# Altium PCB PCB1.PcbDoc
Units mil, origin at the board's own origin, x right, y up, seen from the top; angles counter-clockwise.
Board outline 2579.69 x 2049.7 mil, 2 copper layers (Top Layer, Bottom Layer); 45 components, 37 nets, 189 pads, 20 vias.
Unrouted connection lines stored in the file: 49.
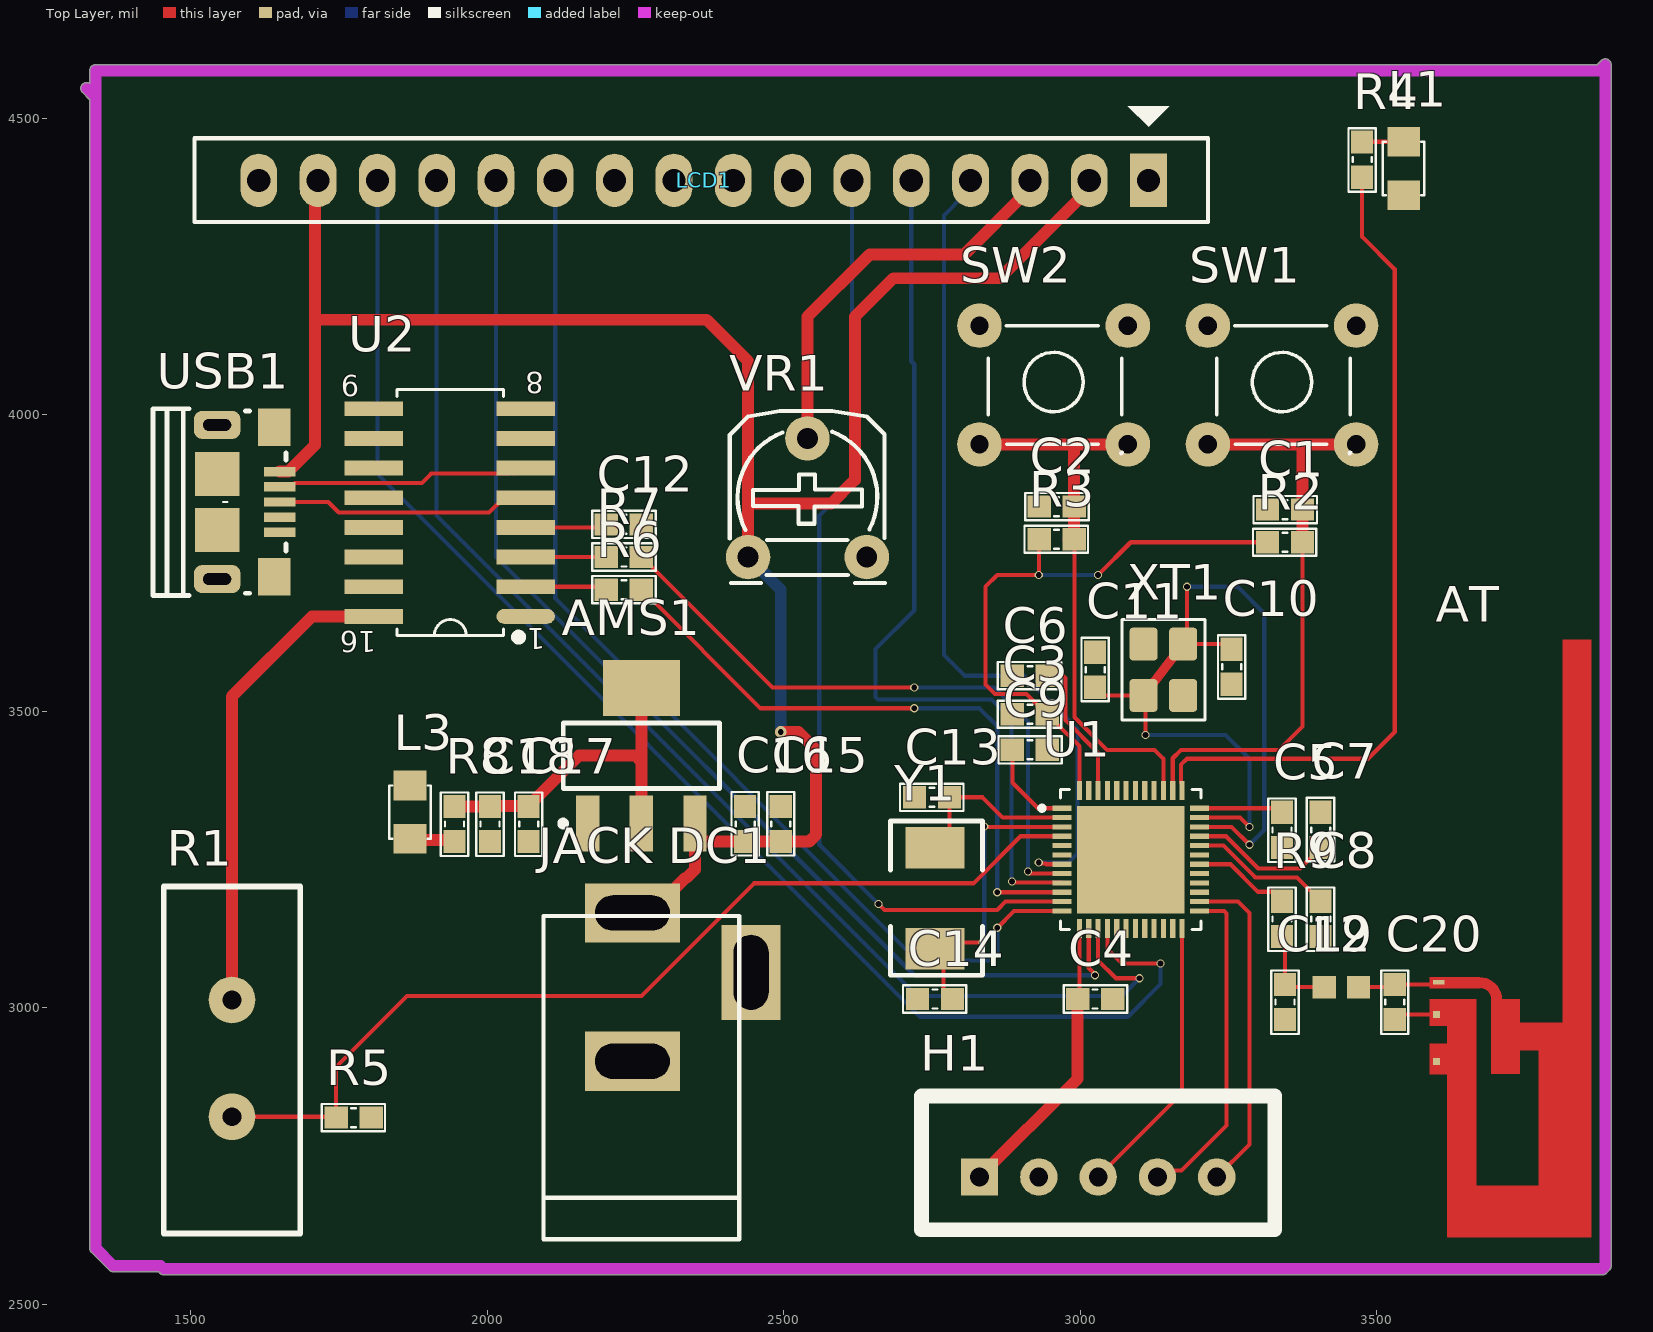
[diagram p0: Top Layer view]
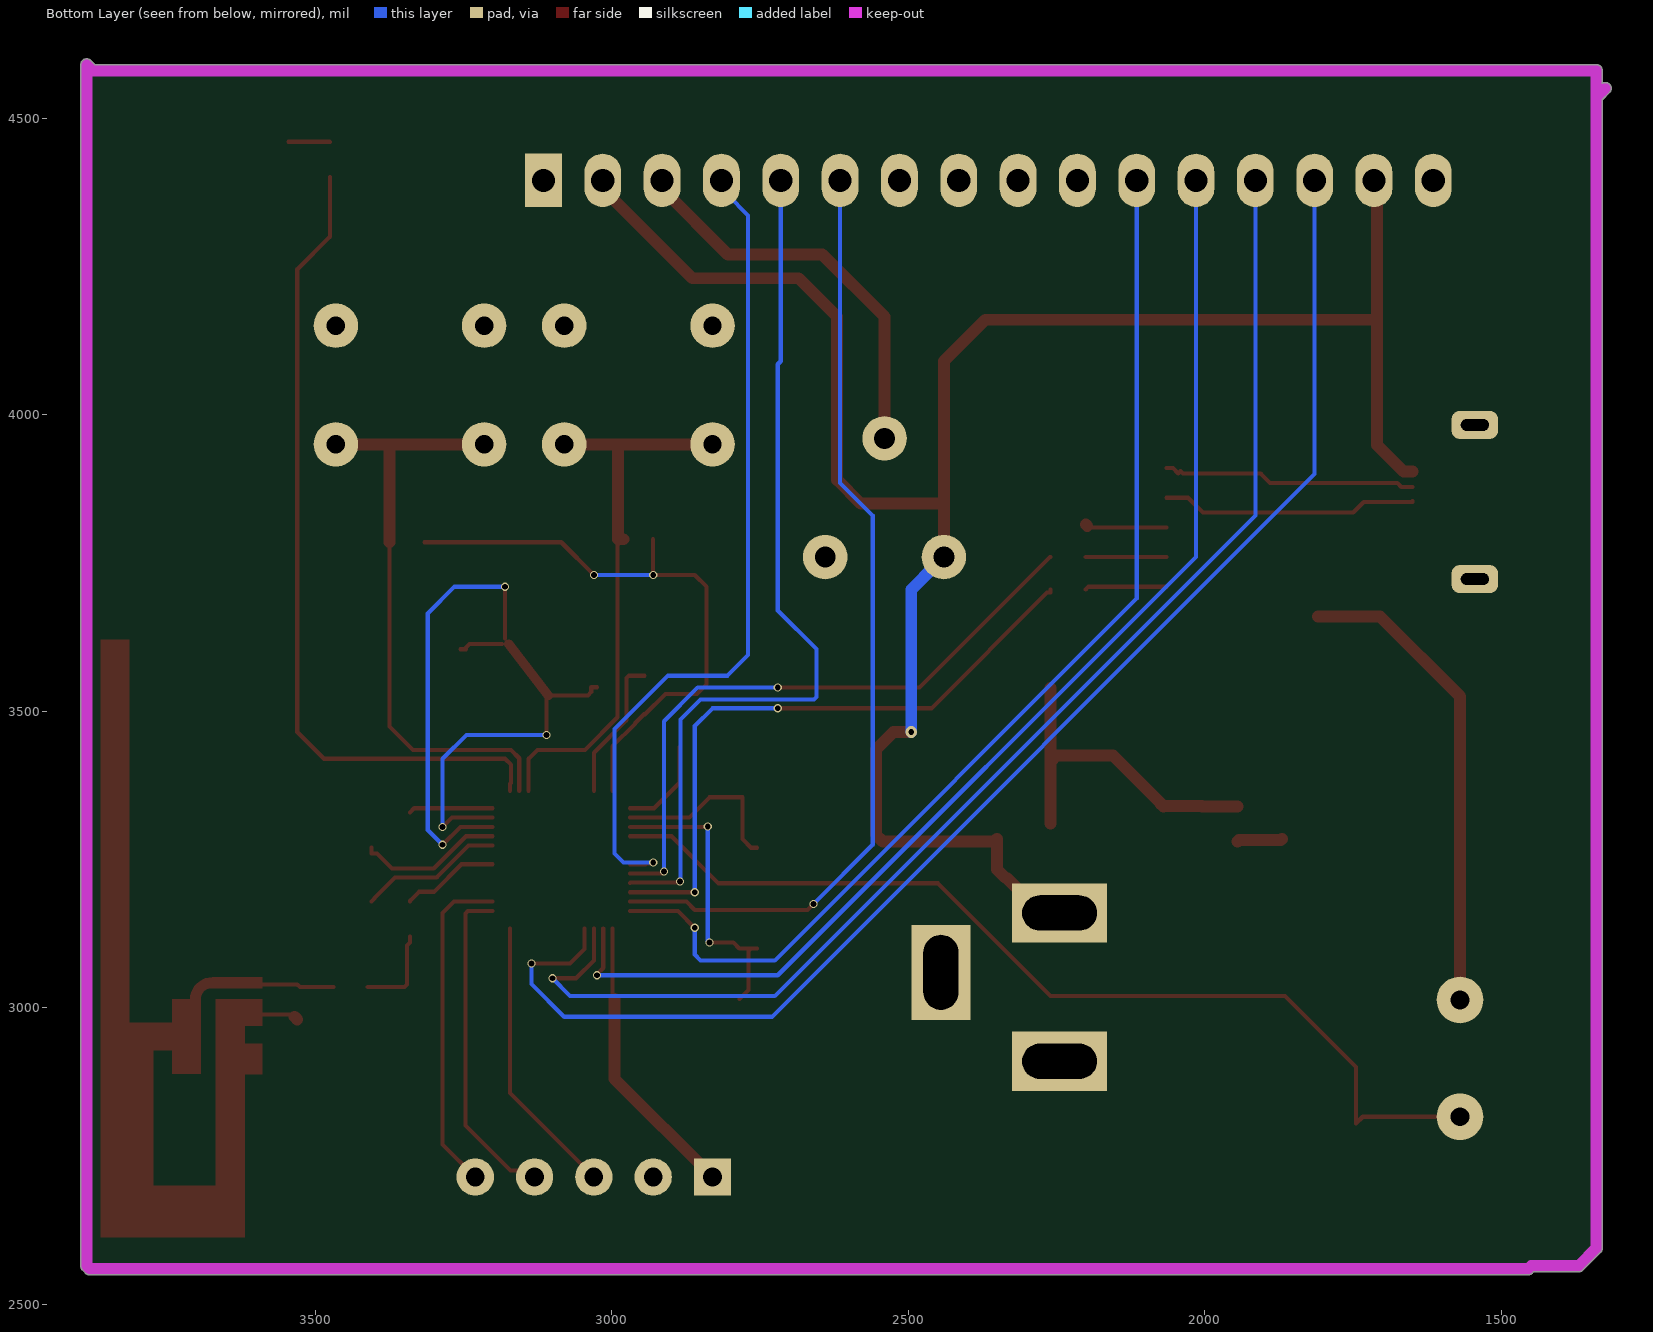
[diagram p1: Bottom Layer view, seen from below]
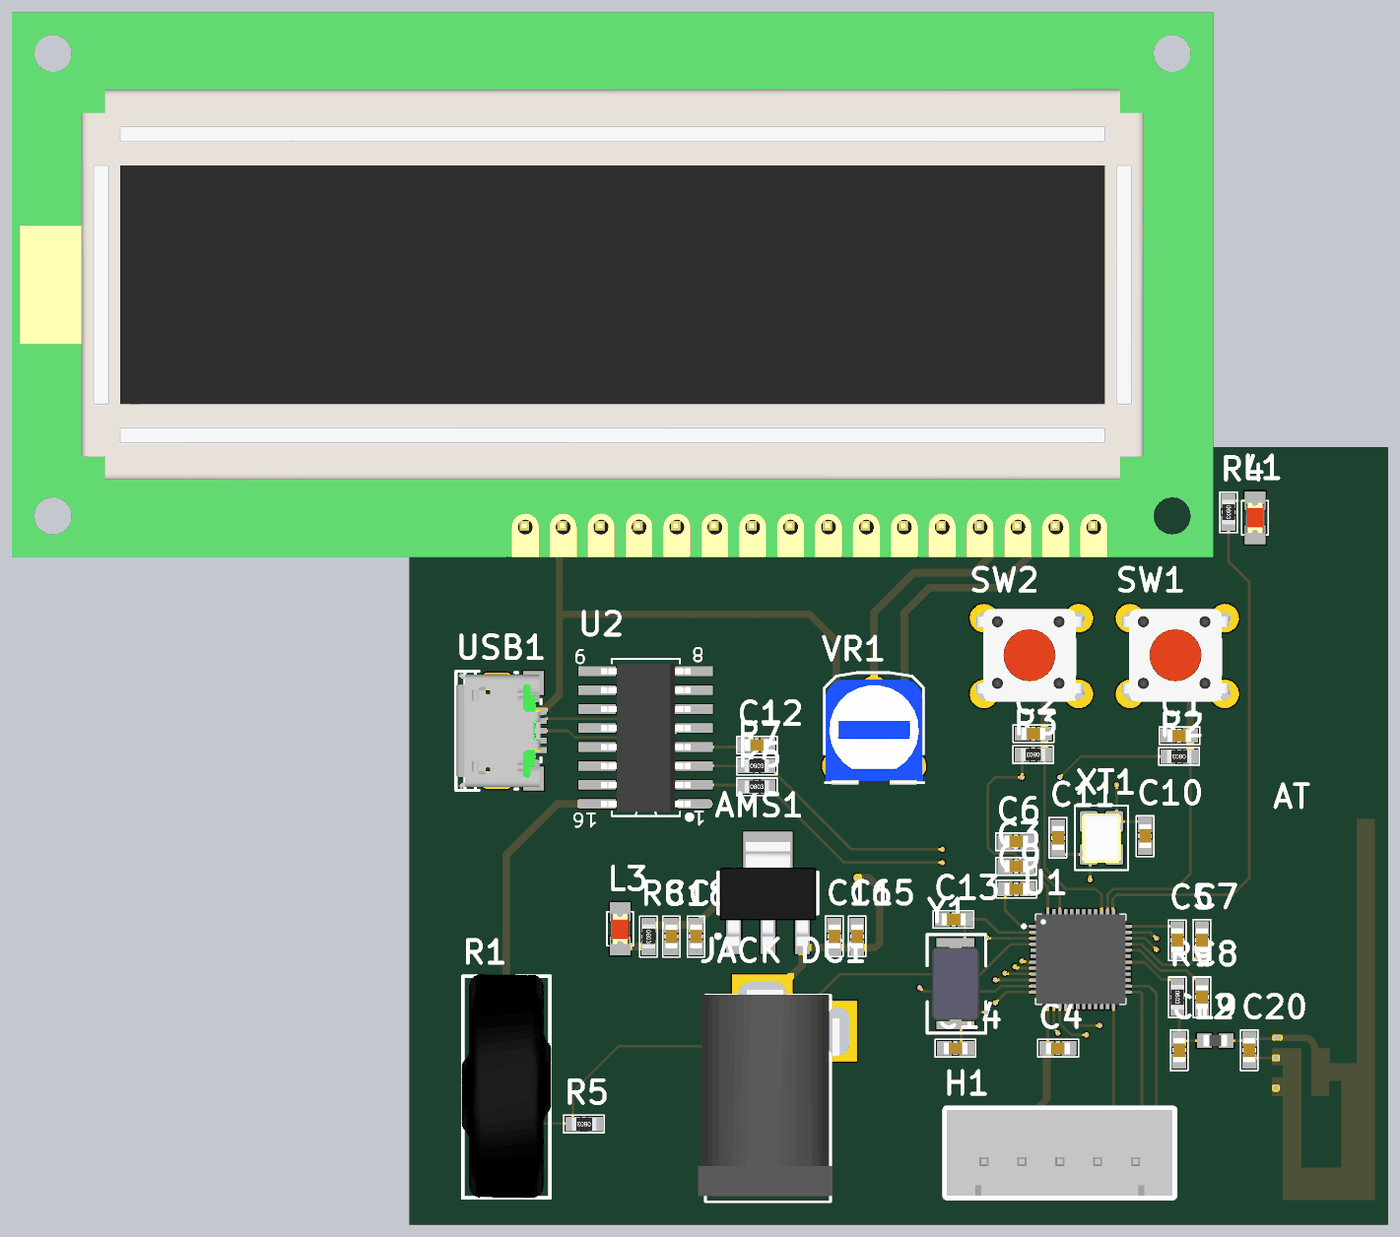
[diagram p2: 3D render of the assembled board from above, using the file's embedded part models]

## Layer stack, top to bottom
Top Solder: solder mask 0.4, Solder Resist, Dk 3.5
Top Layer: signal copper 1.4
Dielectric 1: dielectric 12.6, FR-4, Dk 4.8
Bottom Layer: signal copper 1.4
Bottom Solder: solder mask 0.4, Solder Resist, Dk 3.5

## Board outline
1333.02,2588.04 ccw(c1340.02,2595.02) 1333.04,2588.02 1333.03,2588.03 cw(c1340,2595) 1330.14,2595 1330.14,4530.92 1318.03,4543.03 cw(c1325,4550) 1330.14,4558.41 1330.14,4580 cw(c1340,4580) 1340,4589.86 3870.92,4589.86 3878.04,4596.98 ccw(c3885.02,4589.98) 3878.02,4596.96 3878.03,4596.97 cw(c3885,4590) 3894.86,4590 3894.86,2565 cw(c3885,2565) 3891.97,2558.03 3886.96,2553.02 ccw(c3879.98,2560.02) 3886.98,2553.04 3886.97,2553.03 cw(c3880,2560) 3880,2550.14 1455,2550.14 cw(c1455,2560) 1448.03,2553.03 1448.04,2553.02 cw(c1455.02,2560.02) 1448.02,2553.04 1445.92,2555.14 1370,2555.14 cw(c1370,2565) 1363.03,2558.03

## Design rules (kind name [scope] priority, off if disabled: settings)
Clearance [All] p1: gap=0 ignorepadtopadclearanceinfootprint=FALSE
PolygonConnect [All] p1: connectstyle=Relief reliefconductorwidth=10 reliefentries=4 polygonreliefangle="90 Angle" airgapwidth=10
RoutingVias [All] p1: holewidth=9.84 width=13.78 viastyle="Through Hole" minholewidth=9.84 minwidth=13.78 maxholewidth=9.84 maxwidth=13.78
SolderMaskExpansion [All] p1: expansion=4 istentingtop=FALSE
Width [All] p1: maxlimit=30 minlimit=7 preferedwidth=20
30 further rules are at their usual default settings.

## Components (designator, comment, footprint, x,y, rotation, side; value= is the part's Value field where it differs from the comment)
AMS1 "AMS1117-3.3V" SOT223 2260,3425 r0 top value="AMS1117-3.3V SOT223"
AT "ANTEN" "Anten IFA" 3524,2960 r270 top
C1 "104" "tu 0603" 3345,3840 r0 top
C2 "104" "tu 0603" 2960,3845 r0 top
C3 "104" "tu 0603" 2915,3495 r180 top
C4 "104" "tu 0603" 3025,3015 r0 top
C5 "104" "tu 0603" 3340,3300 r270 top
C6 "0.1uF" "tu 0603" 2915,3560 r180 top
C7 "100pF" "tu 0603" 3405,3300 r90 top
C8 "100pF" "tu 0603" 3405,3150 r270 top
C9 "0.1uF" "tu 0603" 2915,3435 r0 top
C10 "12pF" "tu 0603" 3255,3575 r270 top
C11 "12pF" "tu 0603" 3025,3570 r90 top
C12 "104" "tu 0603" 2230.47,3815 r0 top
C13 "10pF" "tu 0603" 2750,3355 r180 top
C14 "10pF" "tu 0603" 2755,3015 r180 top
C15 "106" "tu 0603" 2495,3310 r90 top
C16 "104" "tu 0603" 2435,3310 r90 top
C17 "106" "tu 0603" 2070,3310 r270 top
C18 "104" "tu 0603" 2005,3310 r270 top
C19 "10pF" "tu 0603" 3345,3010 r270 top
C20 "10pF" "tu 0603" 3530,3010 r270 top
H1 "Header 5P 2.54 Duc Thang" XH2.54M-5 2830,2715 r0 top
"JACK DC1" "JACK DC 5.5" "JACK DC 5.5" 2345,3035 r90 top value="Jac DC"
L1 "LED 0805" LED-0805-Red 3545,4460 r270 top
L2 "LQM18DN6R8M70L" INDC1608X95N 3440,3035 r0 top
L3 "LED 0805" LED-0805-Red 1870,3285 r90 top
LCD1 "LCD1602 XL" "LCD1602 with Jump" 3115,4395 r180 top
R1 "10D-9" "tro nhiet d-9" 1570,2915 r90 top
R2 "1k" "tro smd 0603" 3345,3785 r180 top
R3 "1k" "tro smd 0603" 2960,3790 r180 top
R4 "1k" "tro smd 0603" 3475,4430 r270 top
R5 "10k" "tro smd 0603" 1775,2815 r180 top
R6 "1k" "tro smd 0603" 2230.47,3705 r0 top
R7 "1k" "tro smd 0603" 2230.47,3760 r0 top
R8 "1k" "tro smd 0603" 1945,3310 r270 top
R9 "0" "tro smd 0603" 3340,3150 r270 top
SW1 "SW" SW4 3215,4150 r0 top value="Button chip 4 pin"
SW2 "SW" SW4 2830,4150 r0 top value="Button chip 4 pin"
U1 "NRF52832-QFAA-R" QFN40P600X600X90-49N 3085,3250 r0 top
U2 "CH340C" SOIC16_50_284_25X90_SMT 1937.05,3834.02 r180 top
USB1 "USB Micro 5p DIP" "USB Micro 5p DIP" 1545,3852.76 r270 top
VR1 "10K" "Bien Tro Tam Giac Dung" 2440,3760 r0 top
XT1 "20Mhz" "Thach Anh 4 chan 1" 3140,3570 r90 top value=4Mhz
Y1 "32.768K" "Thach Anh 2 chan SMD5032" 2755,3185 r270 top value=4Mhz

## Footprints (in the part's own frame and the unit in brackets; to place one, negate y for a bottom-side part, rotate by r counter-clockwise, add the part's x,y. Pads: shape width x height; smd on the part's side, far side on the other; paste and mask are expansions set on the pad)
"Anten IFA" [mm]
  rect 0.3x0.3 smd: 1(-0.737,1.93) 2(1.27,1.93)
  rect 0.2x0.5 smd: 3(-2.108,2.032)
  Top Layer region: -16.784,7.351 -16.784,8.561 8.796,8.561 8.796,2.391 1.816,2.391 1.816,1.651 0.521,1.651 0.521,2.391 -0.259,2.391 -0.259,1.651 -1.383,1.651 -1.383,3.643 6.596,3.643 6.596,6.313 0.796,6.313 0.796,5.498 1.811,5.498 1.811,4.294 -1.389,4.294 -1.571,4.258 -1.725,4.154 -1.828,4 -1.865,3.818 -1.865,3.818 -1.865,1.651 -2.325,1.651 -2.325,3.797 -2.253,4.157 -2.049,4.463 -1.743,4.667 -1.383,4.738 -1.383,4.739 -1.383,5.513 -0.388,5.513 -0.388,7.351
"Bien Tro Tam Giac Dung" [mil] "RM065"
  round 75 hole 35: 1(0,0) 2(100,200) 3(200,0)
  silkscreen extent -31,-44 231,246, body extent -28,-50 228,228, height 279
INDC1608X95N [mm]
  rect 1x0.97 smd: 1(-0.735,0) 2(0.735,0)
  body extent -0.8,-0.4 0.8,0.4, height 0.95
"JACK DC 5.5" [mil] "Jac DC input"
  rect 100x160 hole 59.06 slot 125.98 at 90 deg: 1(125,100) 2(-125,100)
  rect 160x100 hole 59.06 slot 125.98 at 0 deg: 3(25,-100)
  silkscreen extent -425,-80 120,250, body extent -410,-105 134,269, height 434
"LCD1602 with Jump" [mil] "LCD dipslay 16x2, 16 pin"
  rect 62x90 hole 39: 1(0,0)
  oval 62x90 hole 39: 2(100,0) 3(200,0) 4(300,0) 5(400,0) 6(500,0) 7(600,0) 8(700,0) 9(800,0) 10(900,0) 11(1000,0) 12(1100,0) 13(1200,0) 14(1300,0) 15(1400,0) 16(1500,0)
  silkscreen extent -100,-125 1608,70, body extent -320,-1353 2850,84, height 764
LED-0805-Red [mil]
  rect 50x55 smd: 1(0,0) 2(90,0)
  silkscreen extent 0,-35 90,35, body extent 5,-25 85,25, height 43
QFN40P600X600X90-49N [mm]
  rect 0.81x0.22 smd: 1(-2.95,2.2) 2(-2.95,1.8) 3(-2.95,1.4) 4(-2.95,1) 5(-2.95,0.6) 6(-2.95,0.2) 7(-2.95,-0.2) 8(-2.95,-0.6) 9(-2.95,-1) 10(-2.95,-1.4) 11(-2.95,-1.8) 12(-2.95,-2.2) 25(2.95,-2.2) 26(2.95,-1.8) 27(2.95,-1.4) 28(2.95,-1) 29(2.95,-0.6) 30(2.95,-0.2) 31(2.95,0.2) 32(2.95,0.6) 33(2.95,1) 34(2.95,1.4) 35(2.95,1.8) 36(2.95,2.2)
  rect 0.22x0.81 smd: 13(-2.2,-2.95) 14(-1.8,-2.95) 15(-1.4,-2.95) 16(-1,-2.95) 17(-0.6,-2.95) 18(-0.2,-2.95) 19(0.2,-2.95) 20(0.6,-2.95) 21(1,-2.95) 22(1.4,-2.95) 23(1.8,-2.95) 24(2.2,-2.95) 37(2.2,2.95) 38(1.8,2.95) 39(1.4,2.95) 40(1,2.95) 41(0.6,2.95) 42(0.2,2.95) 43(-0.2,2.95) 44(-0.6,2.95) 45(-1,2.95) 46(-1.4,2.95) 47(-1.8,2.95) 48(-2.2,2.95)
  rect 4.6x4.6 smd paste-3: 49(0,0)
  silkscreen extent -3.9,-3 3,3, body extent -3,-3 3,3, height 0.9
SOIC16_50_284_25X90_SMT [mm]
  oval 2.5x0.635 smd mask+0.076: 1(-3.25,4.42)
  rect 2.5x0.635 smd mask+0.076: 2(-3.25,3.15) 3(-3.25,1.88) 4(-3.25,0.61) 5(-3.25,-0.66) 6(-3.25,-1.93) 7(-3.25,-3.2) 8(-3.25,-4.47) 9(3.25,-4.47) 10(3.25,-3.2) 11(3.25,-1.93) 12(3.25,-0.66) 13(3.25,0.61) 14(3.25,1.88) 15(3.25,3.15) 16(3.25,4.42)
  silkscreen extent -3.07,-5.3 2.26,5.44, body extent -3.02,-4.97 2.98,4.93, height 1.4
SOT223 [mm]
  rect 1x2.4 smd: 1(-2.3,-2.9) 2(0,-2.9) 3(2.3,-2.9)
  rect 3.3x2.4 smd: 4(0,2.9)
  silkscreen extent -3.47,-3.02 3.35,1.4, body extent -3.25,-3.56 3.25,3.4, height 1.68
SW4 [mil] "SW button 4pin, 250 x250 mil"
  round 75 hole 31: 1(0,0) 2(250,-200) 3(250,0) 4(0,-200)
  silkscreen extent 15,-215 240,0, body extent -36,-220 276,24, height 276
"Thach Anh 2 chan SMD5032" [mil] "DO-214-AA/SMB; 2 C-Bend Leads; Body 5.3 x 3.6 mm, inc. leads (LxW)"
  rect 70x100 smd: 1(-85,0) 2(85,0)
  silkscreen extent -130,-75 130,80, body extent -98,-63 98,63, height 51
"Thach Anh 4 chan 1" [mm] "SMD Crystal 4-lead leadless package"
  round 0.508 on Mech15: 0(0,0)
  rrect25% 1.4x1.2 smd: 1(-1.1,-0.85) 2(1.1,-0.85) 3(1.1,0.85) 4(-1.1,0.85)
  Top Layer lines w0.4: -1.1,0.85 1.1,-0.85
  silkscreen extent -2.16,-1.78 2.16,1.78, body extent -1.65,-1.3 1.65,1.3, height 0.8
"tro nhiet d-9" [mm]
  round 2 hole 0.8: 1(-2.5,0) 2(2.5,0)
  silkscreen extent -7.49,-2.92 7.37,2.92, body extent -7.5,-3 7.5,3, height 23.5
"tro smd 0603" [mm] "Chip Capacitor, 2-Leads, Body 1,60x0,80mm, IPC Medium Density"
  rect 1x0.95 smd mask+0.076: 1(-0.75,0) 2(0.75,0)
  silkscreen extent -1.35,-0.58 1.37,0.58, body extent -0.82,-0.42 0.82,0.43, height 0.44
"tu 0603" [mm] "Chip Capacitor, 2-Leads, Body 1,60x0,80mm, IPC Medium Density"
  rect 1x0.95 smd mask+0.076: 1(-0.75,0) 2(0.75,0)
  silkscreen extent -1.35,-0.58 1.37,0.58, body extent -0.8,-0.4 0.8,0.4, height 0.9
"USB Micro 5p DIP" [mm]
  rect 0.4x1.35 smd mask+0.05: 1(-1.3,2.675) 2(-0.65,2.675) 3(0,2.675) 4(0.65,2.675) 5(1.3,2.675)
  rrect60% 1.2x2 hole 0.5 slot 1.2 at 90 deg: 5(-3.3,0) 5(3.3,0)
  rect 1.6x1.4 smd: 5(-3.2,2.45) 5(3.2,2.45)
  rect 1.9x1.9 smd paste-10: 5(-1.2,0) 5(1.2,0)
  silkscreen extent -4,-2.75 4,2.95, body extent -3.93,-2.76 3.93,2.9, height 2.85
XH2.54M-5 [mm]
  rect 1.6x1.6 hole 0.8: 1(0,0)
  round 1.6 hole 0.8: 2(2.54,0) 3(5.08,0) 4(7.62,0) 5(10.16,0)
  silkscreen extent -2.48,-2.26 12.64,3.46, body extent -2.48,-2.26 12.64,3.48, height 6.91

## Part data
AMS1: library part "AMS1117 SMD", "Dán", Chung_Loai=Dán, Don_Vi=Con, Ma_Hang=MH000596
AT: "Anten IFA- BLE RANGDONG"
C1 C2 C3 C4 C5 C6 C7 C8 C9 C10 C11 C13 C14 C19 C20: library part "Tu 0603 102 50V 10%", "Dán", Chung_Loai=Dán, Don_Vi=Con, Ma_Hang=MH004566, So_Chan=2, Ten_Linh_Kien="Tụ 0603 102-1nF 10% 50V"
C12 C16 C18: library part "Tu 0603 104 50V 10%", "Dán", Chung_Loai=Dán, Don_Vi=Con, Ma_Hang=MH004568, So_Chan=2, Ten_Linh_Kien="Tụ 0603 104-100nF 10% 50V"
C15 C17: library part "Tu 0603 106 16V 20%", "Dán", Chung_Loai=Dán, Don_Vi=Con, Ma_Hang=MH004848, So_Chan=2, Ten_Linh_Kien="Tụ 0603-10uF 20% 16V"
H1: "Cắm", Chung_Loai=Cắm, Don_Vi=Con, Ma_Hang=MH001298, Ten_Linh_Kien="Header 5P XH2.54-5P Đực Thẳng"
L1 L3: library part "LED 0805 Do", "Dán", Chung_Loai=Dán, Don_Vi=Con, Ma_Hang=MH000897, Ten_Linh_Kien="LED 0805 Màu Đỏ (Red)"
L2: "Inductor with Inductance 6.8uH Tol.+/-20% Package 0603 (1608)", Package="0603 Murata", Availability=Warning, Check_prices=https://www.snapeda.com/parts/LQM18DN6R8M70L/Murata/view-part/4901183/?ref=eda, MF="Murata Electronics", MP=LQM18DN6R8M70L, Price=None, Purchase-URL=https://pricing.snapeda.com/search/part/LQM18DN6R8M70L/?ref=eda, SnapEDA_Link=https://www.snapeda.com/parts/LQM18DN6R8M70L/Murata/view-part/4901183/?ref=snap
LCD1: "LCD 1602 Xanh Lá", CHIP=HD44780, Ma_Hang=67HZ, NCC=NSHOP, Ten="Màn hình LCD 1602 Xanh Lá"
R1: library part "Tro Nhiet NTC 10D-9", "Cắm", Chung_Loai=Cắm, Don_Vi=Con, Ma_Hang=MH000922, So_Chan=2, Ten_Linh_Kien="Điện trở nhiệt NTC 10D-9"
R2 R3 R4 R5 R6 R7 R8 R9: library part "Tro 0603 1% 1k", "Dán", Chung_Loai=Dán, Don_Vi=Con, Ma_Hang=MH006334, So_Chan=2, Ten_Linh_Kien="Trở 0603 1% 1k"
SW1 SW2: library part SW4, "Switch button 4 pin"
U1: "IC RF TxRx + MCU Bluetooth, General ISM > 1GHz ANT, Bluetooth v5.0 2.4GHz 48-VFQFN Exposed Pad", Package="VFQFN-48 Nordic Semiconductor", Check_prices=https://www.snapeda.com/parts/NRF52832-QFAA-R/Nordic+Semiconductor+ASA/view-part/?ref=eda, MF=Nordic, MP=NRF52832-QFAA-R, SnapEDA_Link=https://www.snapeda.com/parts/NRF52832-QFAA-R/Nordic+Semiconductor+ASA/view-part/?ref=snap
U2: "USB Bridge, USB to UART USB 2.0 UART Interface", Alternate Part Number-1=NA, Case/Package=SOIC16, Manufacturer=Olimex, Supplier Part Number-1=C84681, Manufacturer Part Number=CH340C, Supplier-1=LCSC
USB1: "USB Type B", Ma_Hang=MH005145, Ten="MicroUSB MK5P DIP"
VR1: library part "Bien tro tam giac 10K Dung", "Cắm", Chung_Loai=Cắm, Don_Vi=Con, Ma_Hang=MH000919, Ten_Linh_Kien="Biến Trở Tam Giác 103-10K RM065 (Chân Đứng)"
XT1: library part "Thach Anh 4 Chan SMD", "Crystal For all Crystal 2pin."
Y1: library part "Thach Anh 2 chan SMD 5032", "Crystal For all Crystal 2pin."

## Via types
v1: diameter 13.78, hole 9.84, Top Layer to Bottom Layer, 19 vias
v2: diameter 19.68, hole 9.84, Top Layer to Bottom Layer, 1 vias

## Nets (pads, with @x,y where several pads share a name; then routed paths per layer and width w, separated by ;. In a path a pad name is that pad's centre, name@x,y a point inside that pad or via, vN(x,y) a via of type N, cw(c..) or ccw(c..) an arc to the next point about the centre after c; other vN are vias at no path point)
+3.3V: AMS1.2 AMS1.4 C3.1 C4.1 C5.1 C12.1 C17.1 C18.1 H1.1 R1.2 R2.2 R3.2 R8.1 U1.13 U1.36 U1.48 U2.4 U2.16 | length 3167.8
  Top Layer w7: U2.4 2195.94,3810 C12.1@2198.44,3812.5 ; v1(2930,3730) 2860,3730 2840,3710 2840,3545 2855.9,3529.1 2909.44,3529.1 2943.54,3495 C3.1 2945.51,3495 2960.71,3479.8 2960.71,3478.81 2998.39,3441.14 U1.48 ; v1@2930.47,3730 R3.2 ; C4.1 2998.39,3017.91 U1.13 ; v1(3030,3730) 3085,3785 R2.2 ; U1.36 3332.91,3336.61 C5.1
  Top Layer w20: R1.2 1570,3525 1705,3660 U2.16 ; R8.1 2004.02,3339.53 C18.1@2005,3340.51 ; C18.1 C18.1@2005,3340.51 ; C17.1@2069.02,3340.51 C18.1@2005,3340.51 ; C17.1 2075,3344.53 2075,3345.51 2155,3425.51 2249.49,3425.51 2260,3415 ; C12.1@2198.44,3812.5 C12.1 ; AMS1.2 2260,3415 ; AMS1.4 2260,3415 ; H1.1 2995.47,2880.47 C4.1
  Bottom Layer w7: v1(2930,3730) v1(3030,3730)
+5: "JACK DC1.1" AMS1.3 C15.1 C16.1 LCD1.2 LCD1.15 USB1.1 VR1.1 | length 3538
  Top Layer w7: LCD1.15@1710,4390 LCD1.15
  Top Layer w20: USB1.1 1664.76,3903.94 1710,3949.17 1710,4160 ; LCD1.15@1710,4390 1710,4160 ; 2285,3160 2285,3170 2334.44,3219.44 2336.41,3219.44 2350.55,3233.58 2350.55,3285 2355.08,3280.47 C16.1 C15.1 2542.81,3280.47 2554.53,3292.19 2554.53,3435.47 2525,3465 v2(2495,3465) ; VR1.1 2440,3850 ; LCD1.2 3020,4395 3020,4386 2864,4230 2685,4230 2620,4165 2620,3890 2580,3850 2440,3850 ; 1710,4160 2370,4160 2440,4090 2440,3850
  Top Layer w30: 2245,3160 2285,3160
  Bottom Layer w20: VR1.1 2445,3760 2445,3745 2455,3745 2495,3705 v2(2495,3465)
ANT: R9.1 U1.30 | length 165.4
  Top Layer w7: U1.30 3252.87,3242.13 3299.29,3195.71 3324.8,3195.71 3340,3180.51 R9.1
BUTTON1: C2.2 R3.1 SW2.2 SW2.4 U1.39 | length 958.4
  Top Layer w7: R3.1@2980,3790 2990,3780 2990,3490 3045,3435 3125,3435 3140.12,3419.88 U1.39
  Top Layer w20: SW2.4 2985,3950 ; R3.1@2980,3790 R3.1 C2.2 2989.53,3945.47 2985,3950 ; SW2.2 2985,3950
BUTTON2: C1.2 R2.1 SW1.2 SW1.4 U1.38 | length 1023
  Top Layer w7: U1.38 3155.87,3420.87 3170,3435 3335,3435 3374.53,3474.53 R2.1
  Top Layer w20: SW1.4 3370,3950 ; R2.1 C1.2 3374.53,3945.47 3370,3950 ; SW1.2 3370,3950
CLK: H1.4 U1.25 | length 557.3
  Top Layer w7: H1.4 3140.71,2725.71 3170.71,2725.71 3246.61,2801.61 3246.61,3159.29 3242.51,3163.39 U1.25
D4: LCD1.11 U1.12 | length 1872.4
  Top Layer w7: v1(2860,3135) 2888.39,3163.39 U1.12
  Bottom Layer w7: LCD1.11 2115,3690 2725,3080 2850,3080 2860,3090 v1(2860,3135)
D5: LCD1.12 U1.14 | length 2020.4
  Top Layer w7: U1.14 3014.13,3067.7 3025,3056.83 v1(3025,3055)
  Bottom Layer w7: LCD1.12 2015,3760 2720,3055 v1(3025,3055)
D6: LCD1.13 U1.15 | length 2234.3
  Top Layer w7: U1.15 3030,3133.74 3030,3080 3060,3050 v1(3100,3050)
  Bottom Layer w7: LCD1.13 1915,3830 2725,3020 3070,3020 v1(3100,3050)
D7: LCD1.14 U1.16 | length 2385.7
  Top Layer w7: U1.16 3045.63,3099.37 3070,3075 v1(3135,3075)
  Bottom Layer w7: LCD1.14 1815,3900 2730,2985 3080,2985 3135,3040 v1(3135,3075)
DIO: H1.5 U1.26 | length 559.6
  Top Layer w7: U1.26 3265.87,3179.13 3285,3160 3285,2770 H1.5
EN: LCD1.6 U1.11 | length 1607.2
  Top Layer w7: v1(2660,3175) 2670,3165 2860,3165 2874.13,3179.13 U1.11
  Bottom Layer w7: LCD1.6 2615,4385 2620,4380 2615,4375 2615,3885 2560,3830 2560,3275 v1(2660,3175)
GND: "JACK DC1.2" "JACK DC1.3" AMS1.1 AT.1 AT.2 C1.1 C2.1 C3.2 C4.2 C5.2 C7.2 C8.2 C9.2 C10.2 C11.2 C12.2 C13.2 C14.2 C15.2 C16.2 C17.2 C18.2 C19.2 C20.2 H1.2 L1.2 L3.2 LCD1.1 LCD1.16 R5.1 SW1.1 SW1.3 SW2.1 SW2.3 U1.31 U1.45 U2.1 USB1.5 VR1.3 XT1.1 XT1.3 | length 73.5
  Top Layer w7: C20.2@3534.53,2985 3538.53,2989 AT.1
  Top Layer w20: C20.2 C20.2@3534.53,2985
LED: R4.2 U1.37 | length 1385.6
  Top Layer w7: U1.37 3171.61,3377.76 3170,3379.37 3170,3410 3180,3420 3485,3420 3530,3465 3530,4245 3475,4300 R4.2
NetAT_3: AT.3 C20.1 L2.2 | length 138.4
  Top Layer w7: L2.2 3525.47,3035 C20.1 3600.53,3039.53 AT.3
NetC6_1: C6.1 U1.46 | length 244.7
  Top Layer w7: C6.1 2970.9,3560 2975,3555.9 2975,3485 3029.88,3430.12 U1.46
NetC7_1: C7.1 U1.33 | length 247.2
  Top Layer w7: U1.33 3245.63,3289.37 3300,3235 3370.51,3235 3395.51,3260 3405,3260 C7.1
NetC8_1: C8.1 U1.32 | length 243.4
  Top Layer w7: U1.32 3241.38,3273.62 3295,3220 3365.51,3220 3400,3185.51 3400,3184.53 C8.1
NetC9_1: C9.1 U1.1 | length 161.6
  Top Layer w7: C9.1@2885.47,3440 2885.47,3379.53 2928.39,3336.61 U1.1
NetC10_1: C10.1 U1.34 XT1.2 | length 808.3
  Top Layer w7: XT1.2@3180,3622.62 v1(3180,3710) ; XT1.2@3184.84,3613.31 3239.8,3613.31 3245.47,3607.63 3245.47,3604.53 C10.1 ; U1.34 3201.26,3305 3255,3305 v1(3285,3275)
  Bottom Layer w7: v1(3180,3710) 3265,3710 3310,3665 3310,3300 v1(3285,3275)
NetC11_1: C11.1 U1.35 XT1.4 | length 557.1
  Top Layer w7: C11.1 3034.53,3540.47 3034.53,3532.37 3040.2,3526.69 XT1.4 3110,3523.23 v1(3110,3460) ; U1.35 3269.13,3320.87 v1(3285,3305)
  Bottom Layer w7: v1(3110,3460) 3245,3460 3285,3420 v1(3285,3305)
NetC13_1: C13.1 U1.2 Y1.1 | length 304.5
  Top Layer w7: Y1.1 2765,3270 2779.53,3284.53 C13.1 2835,3355 2869.13,3320.87 U1.2
NetC14_1: C14.1 U1.3 Y1.2 | length 505.6
  Top Layer w7: Y1.2 Y1.2@2765,3100 ; C14.1 2769.33,3030.2 2769.33,3095.67 Y1.2@2765,3100 ; v1(2835,3110) 2795,3110 2785,3100 Y1.2@2765,3100 ; v1(2838,3306) 2839.01,3305 U1.3@2968.74,3305
  Bottom Layer w7: v1(2835,3110) 2838,3113 v1(2838,3306)
NetC19_1: C19.1 L2.1 R9.2 | length 151
  Top Layer w7: R9.2 3340,3110 3345,3105 C19.1 3349.53,3035 L2.1
NetL1_1: L1.1 R4.1 | length 70.2
  Top Layer w7: R4.1 3475.47,4460 L1.1
NetL3_1: L3.1 R8.2 | length 76.9
  Top Layer w20: L3.1 1872.26,3282.74 1942.74,3282.74 R8.2
NetLCD1_3: LCD1.3 VR1.2 | length 683.5
  Top Layer w7: VR1.2 VR1.2@2540,3965
  Top Layer w20: VR1.2@2540,3965 2540,4165 2645,4270 2804,4270 2915,4381 LCD1.3
NetR6_1: R6.1 U2.2 | length 138
  Top Layer w7: U2.2 2195.94,3710 R6.1
NetR7_1: R7.1 U2.3 | length 135.9
  Top Layer w7: U2.3 R7.1
NetU2_5: U2.5 USB1.3 | length 435.1
  Top Layer w7: USB1.3 1650.32,3854.68 1652.24,3852.76 1732.24,3852.76 1750,3835 2003.29,3835 2028.29,3860 U2.5
NetU2_6: U2.6 USB1.2 | length 431.1
  Top Layer w7: USB1.2 1669.02,3878.35 1675.67,3885 1890,3885 1906,3901 2036.99,3901 2041,3905 2045,3901 2054,3910 U2.6
NTC: R1.1 R5.2 U1.4 | length 1660.2
  Top Layer w7: R1.1 1733.9,2816.57 1745.47,2805 1745.47,2900.47 1865,3020 2260,3020 2450,3210 2820,3210 2899.37,3289.37 U1.4
R/W: LCD1.5 U1.9 | length 1503
  Top Layer w7: v1(2885,3212.92) 2886.46,3211.46 2968.03,3211.46 U1.9
  Bottom Layer w7: LCD1.5 2715,4090 2720,4085 2720,3670 2655,3605 2655,3524.1 2659.1,3520 2850,3520 2883.7,3486.3 2883.7,3214.22 v1(2885,3212.92)
RS: LCD1.4 U1.7 | length 1436.7
  Top Layer w7: v1(2930,3245) 2931.3,3243.7 2941.3,3243.7 2942.87,3242.13 U1.7
  Bottom Layer w7: LCD1.4 2805,4405 2805,4371 2770,4336 2770,3595 2805,3560 2905,3560 2995,3470 2995,3260 2980,3245 v1(2930,3245)
RST: H1.3 U1.24 | length 477.5
  Top Layer w7: H1.3 3171.61,2856.61 U1.24
RX: R6.2 U1.10 | length 1087.1
  Top Layer w7: R6.2 2260,3700 2265.98,3700 2460.98,3505 v1(2720,3505) ; v1(2860,3195) 2860.06,3194.94 2968.8,3194.94 U1.10
  Bottom Layer w7: v1(2720,3505) 2830,3505 2860,3475 v1(2860,3195)
TX: R7.2 U1.8 | length 1078.2
  Top Layer w7: R7.2 2260.98,3760 2480.98,3540 v1(2720,3540) ; v1(2911.83,3230) 2915.46,3226.38 U1.8
  Bottom Layer w7: v1(2720,3540) 2855,3540 2911.83,3483.17 v1(2911.83,3230)
pads on no net: C6.2 LCD1.7 LCD1.8 LCD1.9 LCD1.10 U1.5 U1.6 U1.17 U1.18 U1.19 U1.20 U1.21 U1.22 U1.23 U1.27 U1.28 U1.29 U1.40 U1.41 U1.42 U1.43 U1.44 U1.47 U1.49 U2.7 U2.8 U2.9 U2.10 U2.11 U2.12 U2.13 U2.14 U2.15 USB1.4 XT1.0

## Keep-outs
Keep-Out Layer:
  lines w19.68: 1325,4550 1340,4535 ; 1340,4535 1340,4580 3875,4580 3885,4590 3885,2565 3880,2560 1455,2560 1450,2565 1370,2565 1340,2595 1340,4535

## Text inside footprints (layer, text, board x,y; h text height)
U2: Top Overlay "16" at 1813.03,3635 h35 r180; Top Overlay "9" at 1784.37,4066.64 h35 r180; Top Overlay "8" at 2095.16,4071.5 h35 r180; Top Overlay "1" at 2098.03,3640 h35 r180